# Altium PCB PCB1.PcbDoc
Units mil, origin at the board's own origin, x right, y up, seen from the top; angles counter-clockwise.
Board outline 2376.18 x 2801.18 mil, 2 copper layers (Top Layer, Bottom Layer), stack 61.756 mil thick; 60 components, 29 nets, 134 pads, 254 vias.
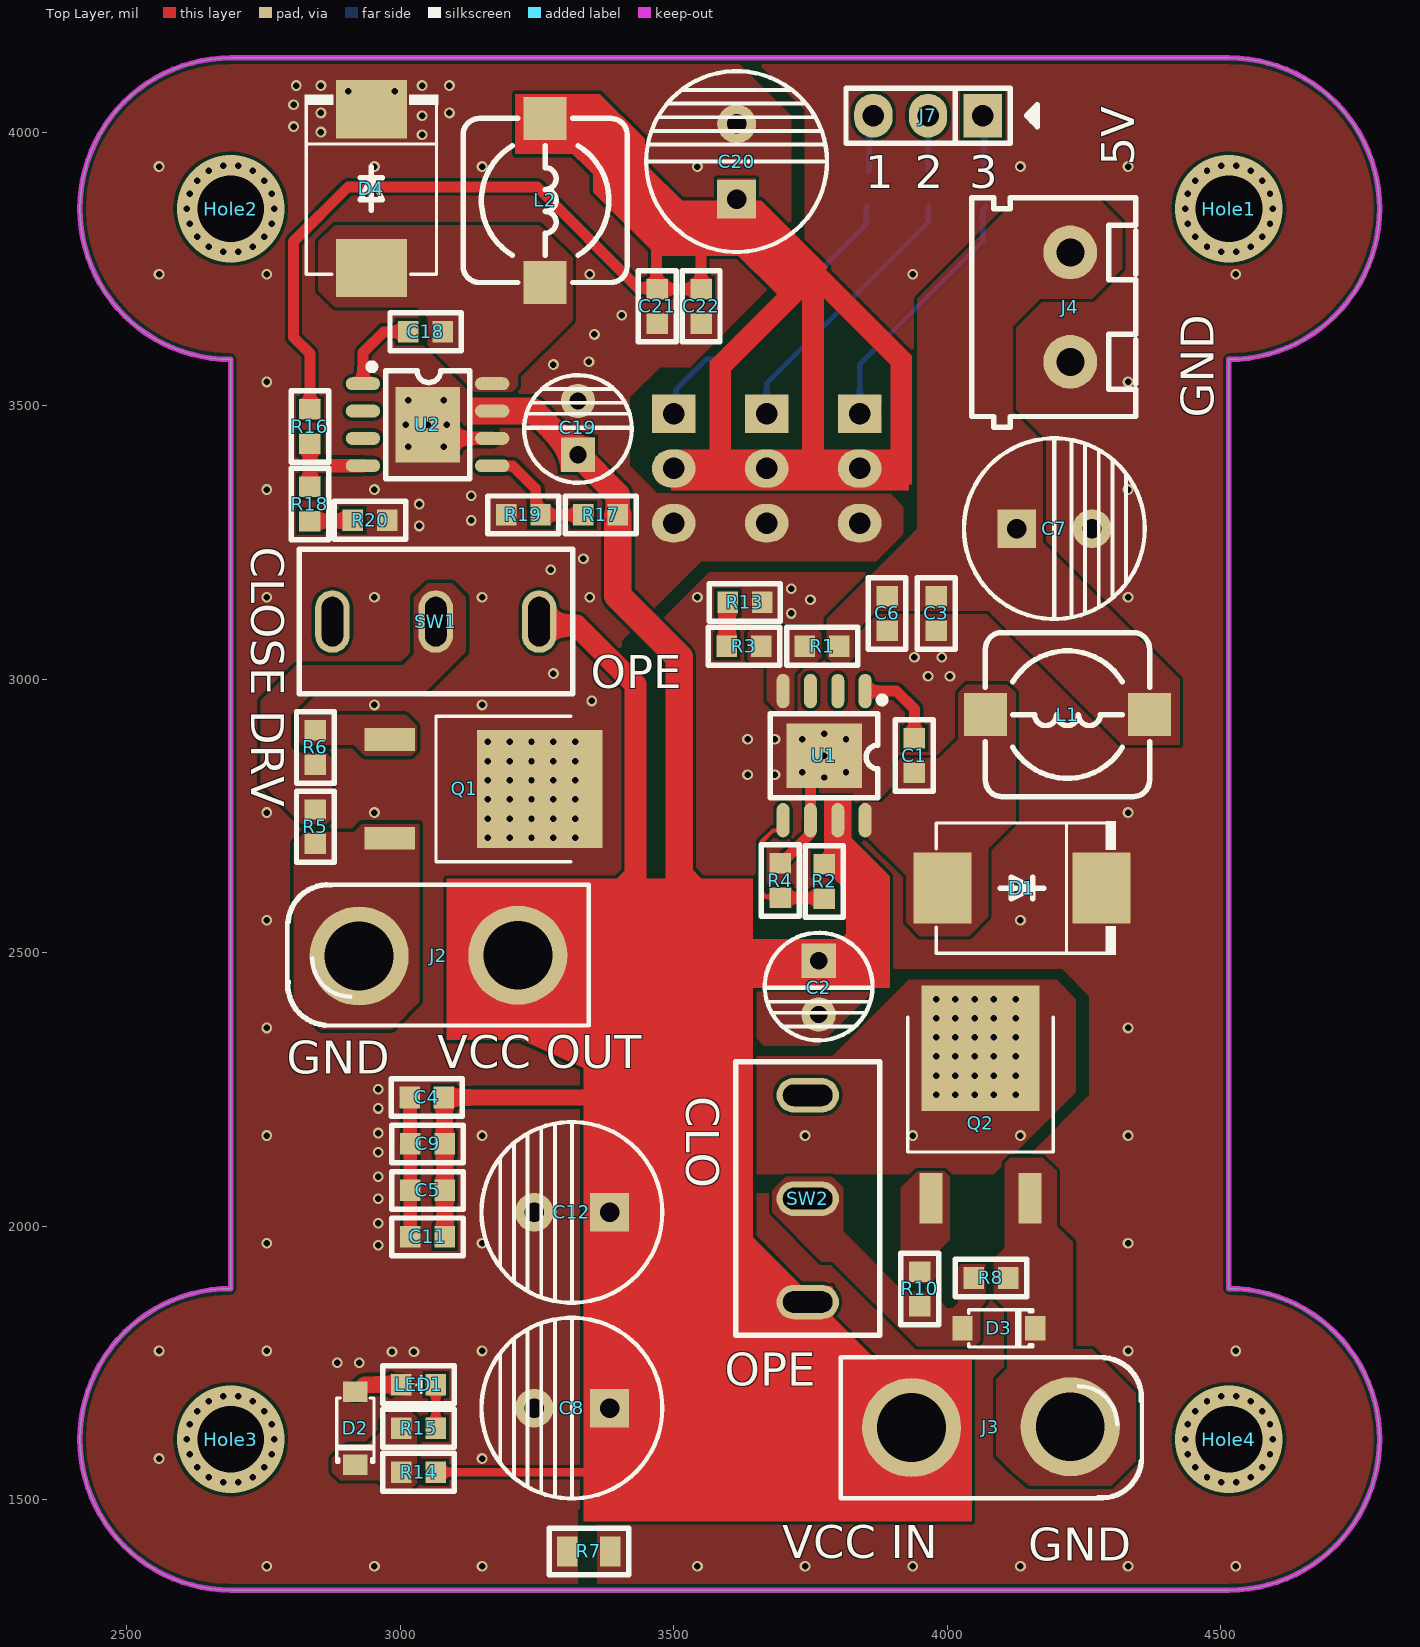
[diagram p0: Top Layer view]
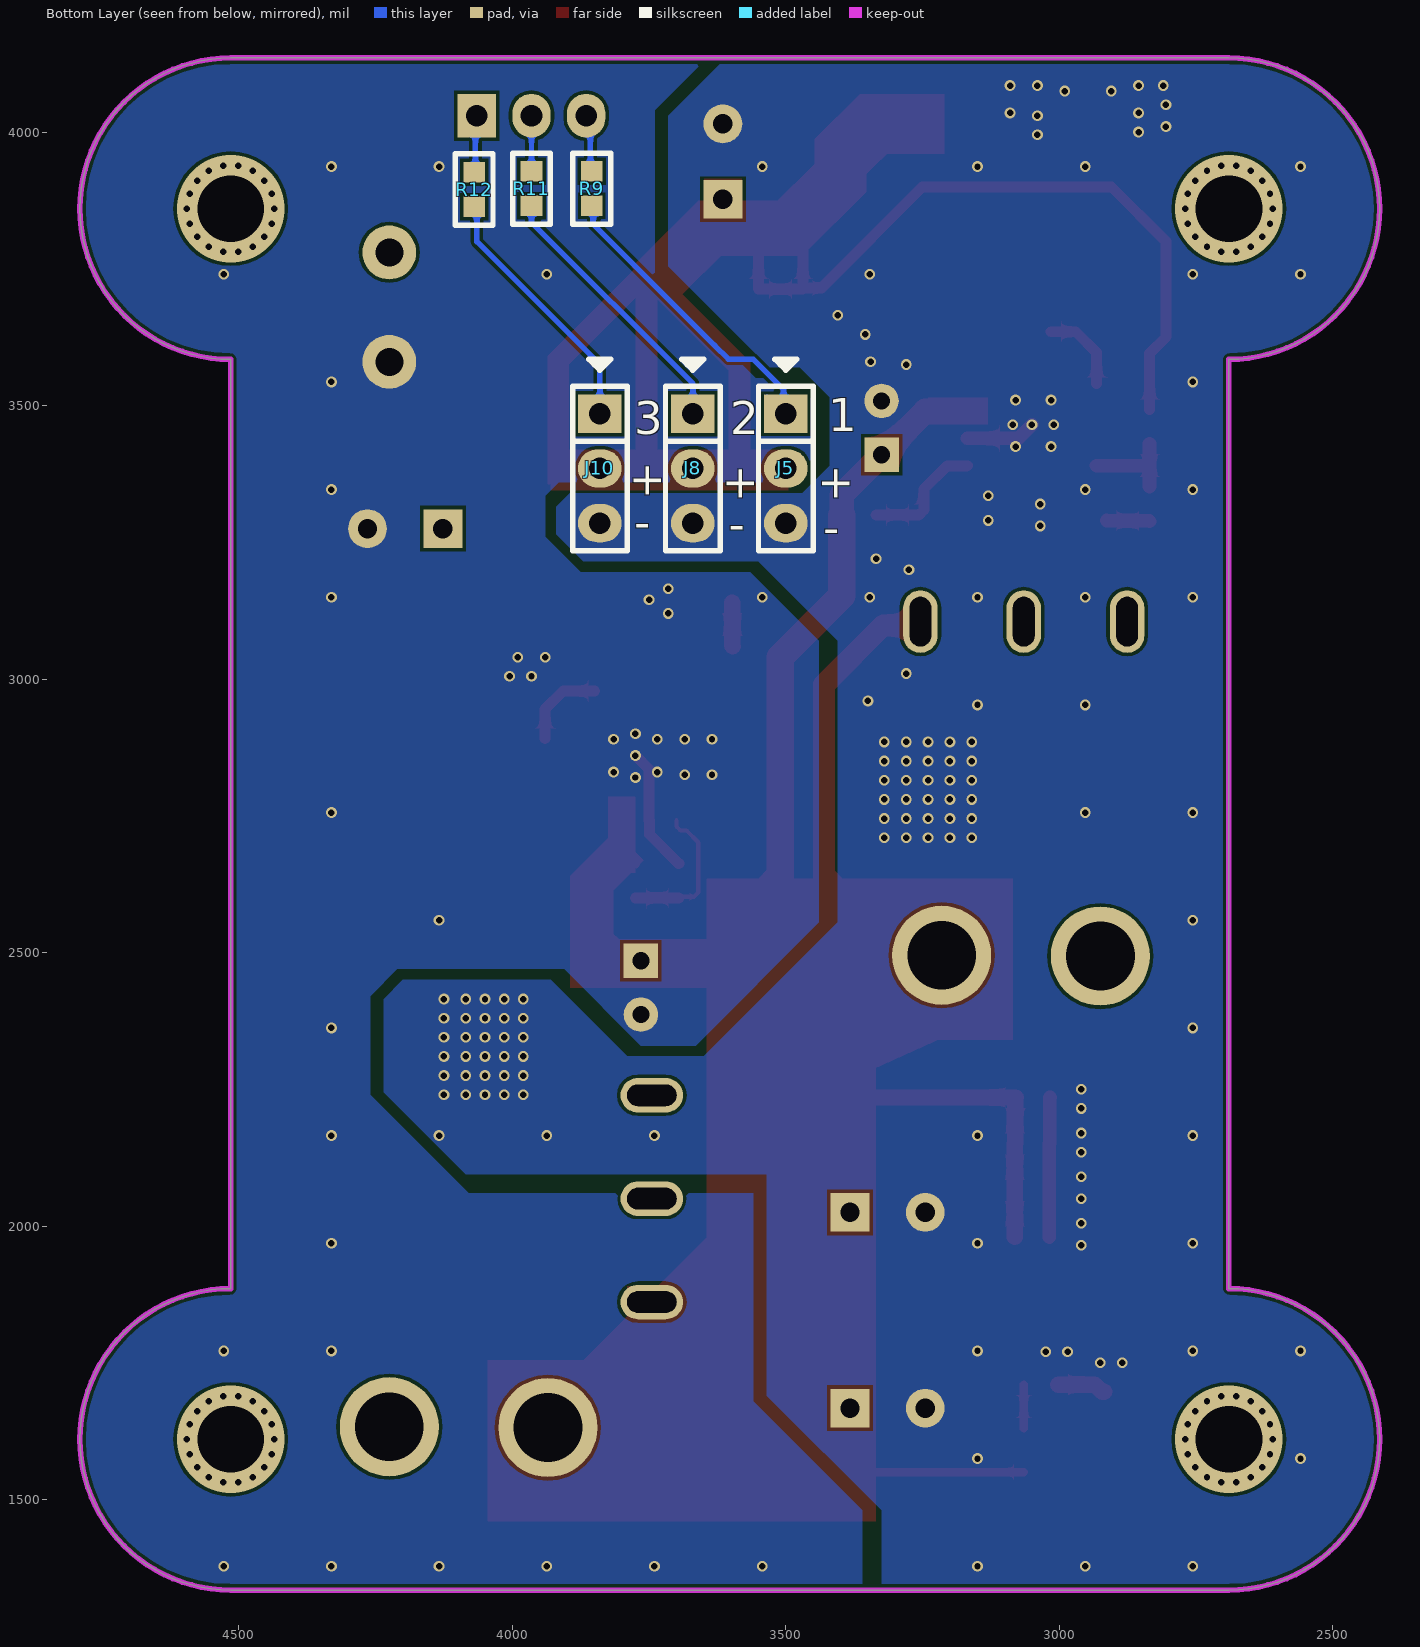
[diagram p1: Bottom Layer view, seen from below]
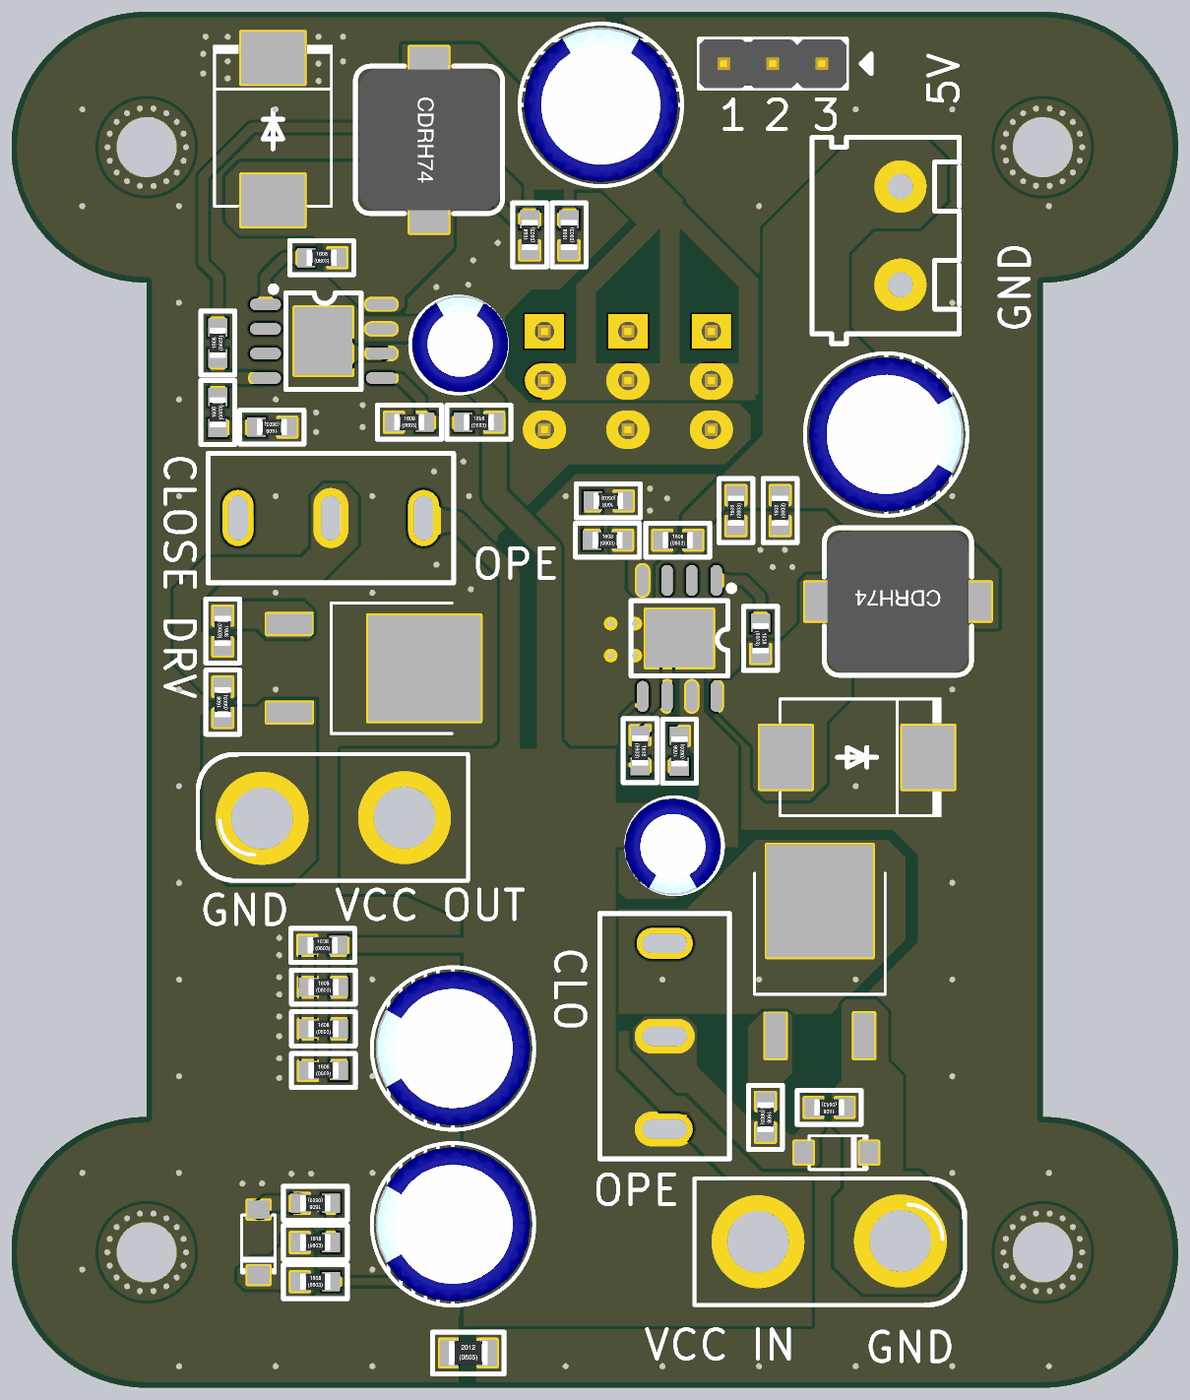
[diagram p2: 3D render of the assembled board from above, using the file's embedded part models]
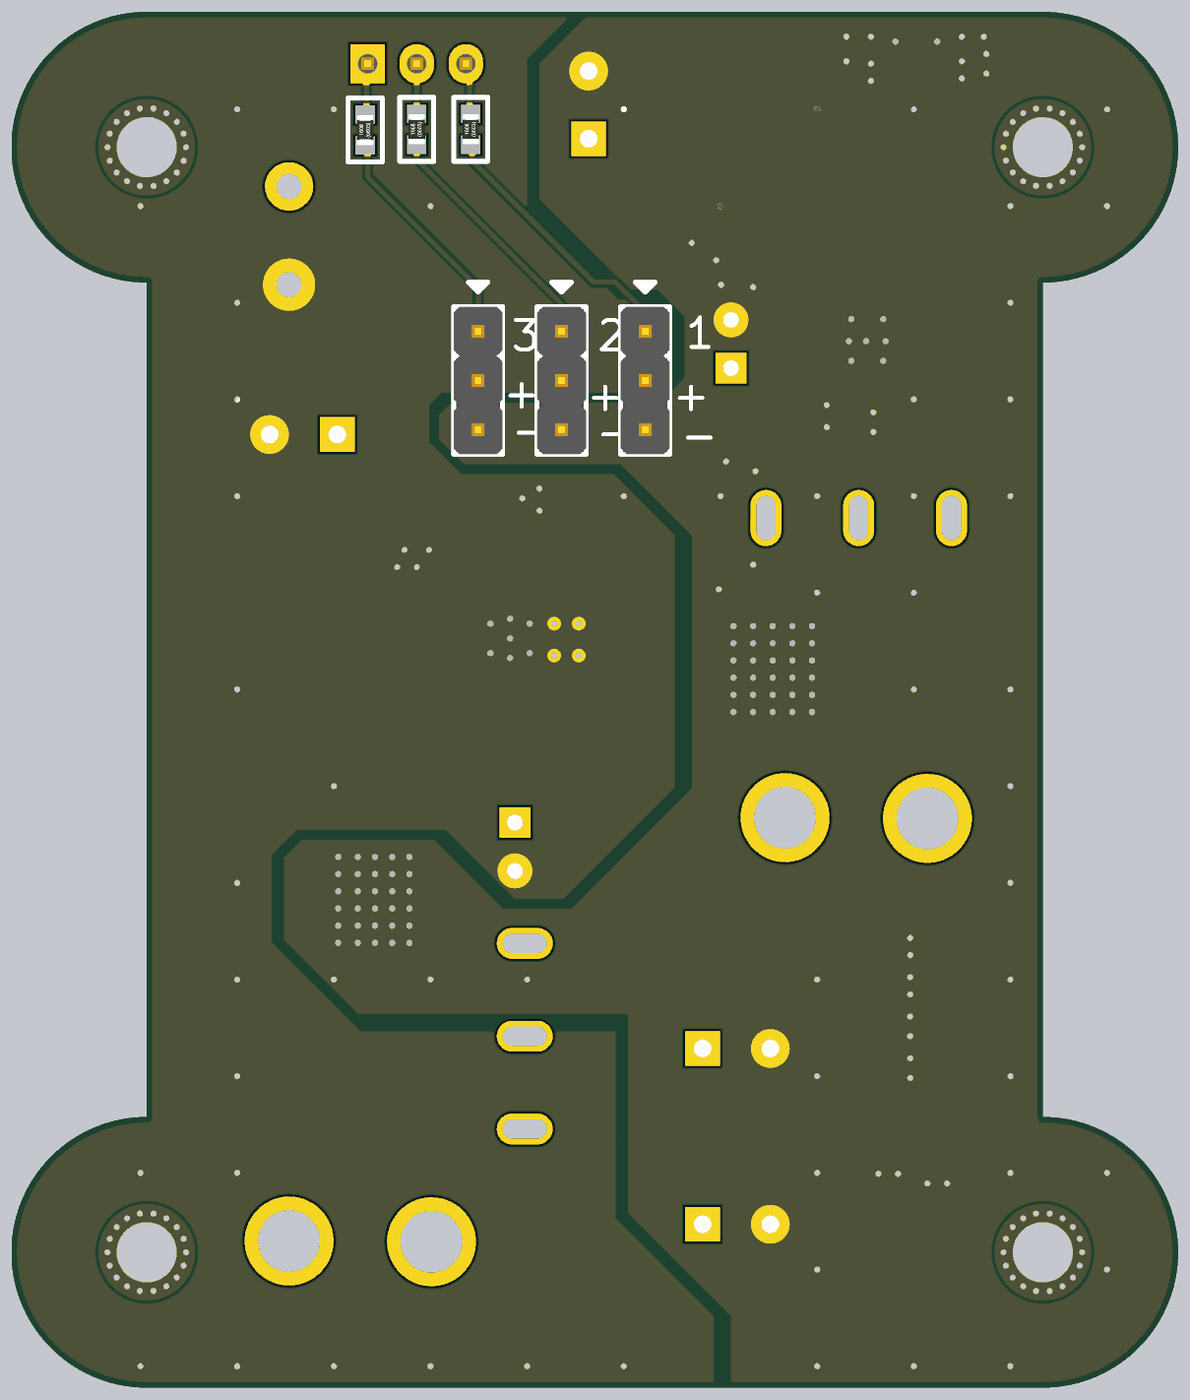
[diagram p3: 3D render of the assembled board from below, using the file's embedded part models]

## Layer stack, top to bottom
Top Solder: solder mask 1, SM-001, Dk 4
Top Layer: signal copper 1.378
Dielectric 1: core 59, Core-043, Dk 4.3
Bottom Layer: signal copper 1.378
Bottom Solder: solder mask 1, SM-001, Dk 4

## Board outline
2414.41,1610 ccw(c2690,1610) 2690,1334.41 4515,1334.41 ccw(c4515,1610) 4790.59,1610 ccw(c4515,1610) 4515,1885.59 4515,3584.41 ccw(c4515,3860) 4790.59,3860 ccw(c4515,3860) 4515,4135.59 2690,4135.59 ccw(c2690,3860) 2414.41,3860 ccw(c2690,3860) 2690,3584.41 2690,1885.59 ccw(c2690,1610)

## Design rules (kind name [scope] priority, off if disabled: settings)
Clearance [All] p1: gap=6 ignorepadtopadclearanceinfootprint=FALSE except(0: Arc-Hole Track-Hole SMDPad-Hole THPad-Hole Via-Hole Fill-Hole Poly-Hole Region-Hole Text-Hole)
PolygonConnect [All] p1: connectstyle=Direct reliefconductorwidth=10 reliefentries=4 polygonreliefangle="90 Angle" airgapwidth=10
RoutingVias [All] p1: holewidth=11.81 width=19.68 viastyle="Through Hole" minholewidth=11.81 minwidth=19.68 maxholewidth=3897.64 maxwidth=39330.71
SolderMaskExpansion [All] p1: expansion=4 istentingtop=FALSE
Width [All] p1: maxlimit=99 minlimit=8 preferedwidth=8
30 further rules are at their usual default settings.

## Components (designator, comment, footprint, x,y, rotation, side; value= is the part's Value field where it differs from the comment)
C1 "10NF" 0603 3940,2860 r270 top
C2 "33UF" DIP-EC2.5X5X11 3765,2485 r270 top
C3 "0.1UF" 0603 3980,3120 r90 top
C4 "0.1UF" 0603 3048.5,2235 r0 top
C5 "10uf" 0603 3050,2065 r0 top
C6 "0.1UF" 0603 3890,3120 r90 top
C7 "220UF" DIP-EC3.5X8X11.5 4127.02,3275 r0 top
C8 "220UF" DIP-EC3.5X8X11.5 3382.8,1667.05 r180 top
C9 "0.1UF" 0603 3050,2150 r0 top
C11 "10uf" 0603 3050,1980 r0 top
C12 "220UF" DIP-EC3.5X8X11.5 3382.8,2025 r180 top
C18 "10NF" 0603 3046.5,3635 r0 top
C19 "33UF" DIP-EC2.5X5X11 3325,3410 r90 top
C20 "220UF" DIP-EC3.5X8X11.5 3615,3877.2 r90 top
C21 "0.1UF" 0603 3470,3681.5 r90 top
C22 "0.1UF" 0603 3550,3681.5 r90 top
D1 "B540C" B540C 4125,2620 r180 top
D2 "BZT52C3V3" sod123 2920,1635 r90 top
D3 "BZT52C16" sod123 4090,1815 r180 top
D4 "B540C" B540C 2945,3885 r270 top
Hole1 "3mmVias" 3mm 4515,3860 r0 top
Hole2 "3mmVias" 3mm 2690,3860 r0 top
Hole3 "3mmVias" 3mm 2690,1610 r0 top
Hole4 "3mmVias" 3mm 4515,1610 r0 top
J2 "TX60" 焊盘 3040,2516.5 r180 top
J3 "TX60" 焊盘 4110,1610 r0 top
J4 "HDR1x2" KF301 4195,3670 r90 top
J5 "HDR1x3" PIN-3-2.54-1.0 3500,3385 r270 bottom
J7 "HDR1x3" PIN-3-2.54-1.0 3965,4030 r180 top
J8 "HDR1x3" PIN-3-2.54-1.0 3670,3385 r270 bottom
J10 "HDR1x3" PIN-3-2.54-1.0 3840,3385 r270 bottom
L1 "10UH" CDRH74 4220,2935 r180 top
L2 "10UH" CDRH74 3265,3875 r270 top
LED1 "LED0" 0603-led 3033.5,1710 r180 top
Q1 "VBE1302" TO-252-2 3140,2795 r180 top
Q2 "VBE1302" TO-252-2 4065,2210 r270 top
R1 "10K" 0603 3771.5,3060 r0 top
R2 "10K" 0603 3775,2630 r90 top
R3 "3K" 0603 3628.5,3060 r0 top
R4 "5K" 0603 3695,2631.5 r270 top
R5 "4.7K" 0603 2845,2730 r90 top
R6 "1K" 0603 2845,2875 r270 top
R7 "0805磁珠" 0805 3345,1405 r0 top
R8 "4.7K" 0603 4080,1905 r180 top
R9 "1K" 0603 3855,3896.5 r90 bottom
R10 "1K" 0603 3950,1885 r270 top
R11 "1K" 0603 3965,3896.5 r90 bottom
R12 "1K" 0603 4070,3895 r90 bottom
R13 "240R" 0603 3630,3140 r180 top
R14 "2.2K" 0603 3033.5,1550 r0 top
R15 "1K" 0603 3033.5,1630 r0 top
R16 "10K" 0603 2835,3461.5 r90 top
R17 "10K" 0603 3366.5,3300 r0 top
R18 "3K" 0603 2835,3320 r90 top
R19 "5K" 0603 3225,3300 r0 top
R20 "240R" 0603 2945,3290 r180 top
SW1 "SWITCH-SPST" ss12d10 3066.53,3107.05 r0 top
SW2 "SWITCH-SPST" ss12d10 3747.05,2048.47 r270 top
U1 "TPS5450" TPS5450 3775,2860 r180 top
U2 "TPS5450" TPS5450 3050,3465 r270 top

## Footprints (in the part's own frame and the unit in brackets; to place one, negate y for a bottom-side part, rotate by r counter-clockwise, add the part's x,y. Pads: shape width x height; smd on the part's side, far side on the other; paste and mask are expansions set on the pad)
3mm [mil]
0603 [mm] "SMD, 0603"
  rect 0.95x1 smd: 1(-0.8,0) 2(0.8,0)
  silkscreen extent -1.66,-0.88 1.66,0.88, body extent -0.78,-0.43 0.77,0.43, height 0.45
0603-led [mm] "SMD, 0603"
  rect 0.95x1 smd: 1(-0.8,0) 2(0.8,0)
  silkscreen extent -1.66,-0.88 1.66,0.88, body extent -0.77,-0.43 0.77,0.43, height 0.45
0805 [mm] "SMD, 0805"
  rect 0.95x1.4 smd: 1(-1,0) 2(1,0)
  silkscreen extent -1.85,-1.08 1.85,1.08, body extent -1,-0.62 1,0.63, height 0.45
B540C [mm]
  rect 2.7x3.3 smd: 1(-3.984,0.054) 2(3.389,0.054)
  silkscreen extent -4.65,-3.05 3.68,3.16
CDRH74 [mm] "7.3*7.3*4.5mm（长宽高）"
  rect 2x2 smd: 1(-3.81,0) 2(3.81,0)
  silkscreen extent -3.81,-3.81 3.81,3.81, body extent -3.65,-3.62 3.65,3.68, height 4.5
DIP-EC2.5X5X11 [mm]
  rect 1.6x1.6 hole 0.8: 1(0,0)
  round 1.6 hole 0.8: 2(2.5,0)
  silkscreen extent -1.3,-2.5 3.7,2.5, body extent -1.25,-2.59 3.75,2.41, height 11.03
DIP-EC3.5X8X11.5 [mm]
  rect 1.8x1.8 hole 0.9: 1(0,0)
  round 1.8 hole 0.9: 2(3.5,0)
  silkscreen extent -2.45,-4.2 5.95,4.2, body extent -2.25,-4 5.75,4, height 11.53
KF301 [mil]
  round 98.42 hole 51.18: 1(-90,-30) 2(110,-30)
  silkscreen extent -210,-150 210,150
PIN-3-2.54-1.0 [mil] "Pin Header"
  rect 70x80 hole 39.37: 1(-100,0)
  oval 70x80 hole 39.37: 2(0,0) 3(100,0)
  silkscreen extent -200,-50 150,50, body extent -150,-50 150,50, height 398
sod123 [mm]
  rect 0.95x1.15 smd: 1(-1.811,0.053) 2(1.574,0.053)
  silkscreen extent -1.7,-0.81 1.29,0.92
ss12d10 [mm]
  oval 1.6x2.9 hole 1 slot 2.3 at 90 deg: 1(-4.839,-0.052) 2(-0.039,-0.052) 3(4.761,-0.052)
  silkscreen extent -6.39,-3.4 6.31,3.3
TO-252-2 [mil]
  rect 91.97x41.89 smd: 1(159.14,-94.24) 3(159.14,86.08)
  rect 229.37x216.19 smd: 4(-115.31,-4.08)
  silkscreen extent -172,-137 75,129
TPS5450 [mm]
  oval 0.6x1.6 smd: 1(-1.905,-3) 2(-0.635,-3) 3(0.635,-3) 4(1.905,-3) 5(1.905,3) 6(0.635,3) 7(-0.635,3) 8(-1.905,3)
  rect 3.5x3 smd: 9(0,0)
  silkscreen extent -2.84,-2.74 2.5,1.95
焊盘 [mm]
  round 4.6 hole 3.2: 1(2.921,0.584) 2(-4.445,0.546)
  silkscreen extent -7.73,-2.73 6.25,3.81, body extent -7.7,-2.73 6.25,3.78, height 0.25

## Part data
C1 C3 C4 C5 C6 C9 C11 C18 C21 C22: library part CAP, "Capacitor"
C2 C7 C8 C12 C19 C20: library part CAP-TANTALUM, "Tantalum Capacitor"
D1 D3 D4: library part SS5x, "Schottky Diode"
D2: library part "Diode 18TQ045", "Schottky Rectifier", ComponentLink1Description="Manufacturer Link", ComponentLink1URL=http://www.irf.com/, ComponentLink2Description=Datasheet, ComponentLink2URL=http://www.irf.com/product-info/datasheets/data/18tq.pdf, DatasheetVersion=Dec-1997, LatestRevisionDate=17-Jul-2002, LatestRevisionNote="Re-released for DXP Platform.", Note="Terminal 2 is the TAB and is electrically connected to the cathode", PackageDescription="TO, Thru-Hole, Vertical, Heatsink Mounted; 3 In-Line Leads (1 Absent); Pitch 2.54 mm", PackageReference=TO-220AC, PackageVersion=Feb-1998, Published=8-Jun-2000, Publisher="Altium Limited"
J2 J3: library part HDR1x2, "Connector"
J4 J5 J7 J8 J10: "Connector"
L1 L2: library part INDUCTANCE, "Inductance"
LED1: "Typical INFRARED GaAs LED", LatestRevisionDate=08-Jul-2005, LatestRevisionNote="Mech Layer 1 removed.", PackageDescription="LED; 2 Leads", PackageReference=LED-0, Published=8-Jun-2000, Publisher="Altium Limited"
Q1 Q2: library part FDB52N20, "N-Channel MOSFET"
R1 R2 R3 R4 R5 R6 R7 R8 R9 R10 R11 R12 R13 R14 R15 R16 R17 R18 R19 R20: library part RES, "Resistor"
SW1 SW2: "Switch"

## Via types
v1: diameter 19.68/19.68 (per signal layer), hole 11.81, Top Layer to Bottom Layer, tented both sides, 246 vias
v2: diameter 19.68, hole 11.81, Top Layer to Bottom Layer, 4 vias
v3: diameter 196.85/196.85 (per signal layer), hole 122.05, Top Layer to Bottom Layer, tented both sides, 4 vias

## Nets (pads, with @x,y where several pads share a name; then routed paths per layer and width w, separated by ;. In a path a pad name is that pad's centre, name@x,y a point inside that pad or via, vN(x,y) a via of type N, cw(c..) or ccw(c..) an arc to the next point about the centre after c; other vN are vias at no path point)
3.3: D2.1 R14.1 R15.1
GND: C2.2 C3.1 C6.1 C7.2 D1.1 J4.1 R4.1 R7.2 R13.1 U1.6 U1.9 | length 230.7
  Top Layer w20: R4.1 3695.98,2662.99 3749.31,2716.31 3749.31,2741.2 U1.6 3750,2835 v1(3775,2860)
  other v1: 3543.31,1377.95 3740.16,1377.95 3937.01,1377.95 4133.86,1377.95 4330.71,1377.95 4527.56,1377.95 4330.71,1771.65 4527.56,1771.65 4330.71,1968.5 4330.71,2165.35 4330.71,2362.2 4133.86,2559.06 4330.71,2755.91 3775,2820 3735,2830 3815,2830 3735,2890 3815,2890 3775,2900 3965,3005 4005,3005 3940,3040 3990,3040 3715,3120 3750,3145 3543.31,3149.61 4330.71,3149.61 3715,3165 4330.71,3346.46 4330.71,3543.31 3937.01,3740.16 4527.56,3740.16 4133.86,3937.01 4330.71,3937.01
  other v2: 3635,2825 3685,2825 3635,2890 3685,2890
NetC1_1: C1.1 U1.1 | length 157.2
  Top Layer w20: U1.1 3906.89,2978.11 3940,2945 C1.1
NetC1_2: C1.2 D1.2 L1.2 U1.8
NetC18_1: C18.1 U2.1 | length 155.8
  Top Layer w20: U2.1 2931.89,3596.89 2970,3635 C18.1
NetC18_2: C18.2 D4.2 L2.2 U2.8
NetD3_1: D3.1 J3.1 Q2.3 R8.1
NetD3_2: D3.2 R8.2 R10.2 SW2.2
NetJ2_1: J2.1 Q1.3 R5.1
NetJ5_1: J5.1 R9.1 | length 600.8
  Bottom Layer w10: J5.1@3535,3515 3505,3485 J5.1 3504.14,3489.14 3504.14,3529.14 3560,3585 3605,3585 3630,3610 3852.16,3832.16 3852.16,3862.16 R9.1
NetJ8_1: J8.1 R11.1 | length 502.2
  Bottom Layer w10: J8.1 3670,3540 3965,3835 R11.1
NetJ10_1: J10.1 R12.1 | length 493.8
  Bottom Layer w10: J10.1 3840,3574.74 4065,3799.74 4065,3858.5 R12.1 ; J10.1@3875,3480 J10.1@3875,3500
NetLED1_1: LED1.1 R15.2 | length 80
  Top Layer w15: R15.2 LED1.1
NetQ1_1: Q1.1 R6.1
NetQ2_1: Q2.1 R10.1
NetR1_1: R1.1 R3.2 U1.4
NetR2_1: R2.1 R4.2 U1.5 | length 274.2
  Top Layer w8: R4.2 3693,2602 3668,2602 3660,2610 3660,2701.57 3681.48,2723.05 3692.78,2723.05 3700,2730.27 U1.5
  Top Layer w20: R4.2 R2.1@3775,2600
NetR3_1: R3.1 R13.2 | length 80.6
  Top Layer w30: R3.1 3597.76,3060.75 3597.76,3139.25 R13.2
NetR5_2: R5.2 R6.2 SW1.2
NetR16_1: R16.1 R18.2 U2.4 | length 175.7
  Top Layer w25: R18.2 2835,3390.75 ; R16.1 2835,3390.75 ; U2.4 2835.75,3390 2835,3390.75
NetR17_1: R17.1 R19.2 U2.5 | length 226.7
  Top Layer w20: U2.5 3168.8,3389.31 3205.69,3389.31 3247.8,3347.2 3247.8,3308.7 R19.2 R17.1
NetR18_1: R18.1 R20.2 | length 79.1
  Top Layer w25: R18.1 2835.75,3289.25 2912.76,3289.25 R20.2
PGND: C4.1 C5.1 C8.2 C9.1 C11.1 C12.2 C19.2 C20.2 C21.1 C22.1 D2.2 D4.1 J5.3 J8.3 J10.3 LED1.2 Q1.4 Q2.4 R7.1 R19.1 R20.1 U2.6 U2.9 | length 473.6
  Top Layer w25: C4.1 3017.76,2234.25 3017.76,2150.75 C9.1 C5.1 C11.1 ; v1(3050,3465) 3075,3440 U2.6
  Top Layer w30: D2.2 2921.84,1696.97 2934.87,1710 LED1.2
  other v1: 2755.91,1377.95 2952.76,1377.95 3149.61,1377.95 2559.06,1574.8 3149.61,1574.8 2885,1750 2925,1750 2985,1770 3025,1770 2559.06,1771.65 2755.91,1771.65 3149.61,1771.65 2960,1965 2755.91,1968.5 3149.61,1968.5 2960,2005 2960,2050 2960,2090 2960,2135 2755.91,2165.35 3149.61,2165.35 3740.16,2165.35 3937.01,2165.35 4133.86,2165.35 2960,2170 2960,2215 3980,2240 4015,2240 4050,2240 4085,2240 4125,2240 2960,2250 3980,2275 4015,2275 4050,2275 4085,2275 4125,2275 3980,2310 4015,2310 4050,2310 4085,2310 4125,2310 3980,2345 4015,2345 4050,2345 4085,2345 4125,2345 2755.91,2362.2 3980,2380 4015,2380 4050,2380 4085,2380 4125,2380 3980,2415 4015,2415 4050,2415 4085,2415 4125,2415 2755.91,2559.06 3160,2710 3200,2710 3240,2710 3280,2710 3320,2710 3160,2745 3200,2745 3240,2745 3280,2745 3320,2745 2755.91,2755.91 2952.76,2755.91 3160,2780 3200,2780 3240,2780 3280,2780 3320,2780 3160,2815 3200,2815 3240,2815 3280,2815 3320,2815 3160,2850 3200,2850 3240,2850 3280,2850 3320,2850 3160,2885 3200,2885 3240,2885 3280,2885 3320,2885 2952.76,2952.76 3149.61,2952.76 3350,2960 3280,3010 2755.91,3149.61 2952.76,3149.61 3149.61,3149.61 3346.46,3149.61 3275,3200 3335,3220 3035,3280 3130,3290 3035,3320 3130,3335 2755.91,3346.46 2952.76,3346.46 3015,3425 3080,3425 3010,3465 3085,3465 3015,3510 3080,3510 2755.91,3543.31 3280,3575 3345,3580 3355,3630 3405,3665 2559.06,3740.16 2755.91,3740.16 3346.46,3740.16 2559.06,3937.01 2952.76,3937.01 3149.61,3937.01 3543.31,3937.01 3040,3995 2855,4000 2805,4010 3040,4030 2855,4035 3090,4035 2805,4050 2905,4075 2990,4075 2810,4085 2855,4085 3040,4085 3090,4085
SERVE_CTR_1: J7.3 R9.2 | length 106.1
  Bottom Layer w10: R9.2 3857.35,3930.34 3857.35,4022.35 J7.3
SERVE_CTR_2: J7.2 R11.2 | length 102
  Bottom Layer w10: R11.2 J7.2
SERVE_CTR_3: J7.1 R12.2 | length 105.6
  Bottom Layer w10: J7.1 4067.5,4027.5 4067.5,3929 R12.2
VCC5V: C3.2 C6.2 C7.1 J4.2 L1.1 R1.2
VCC_serve: C20.1 C21.2 C22.2 J5.2 J8.2 J10.2 L2.1 R16.2 | length 1381.6
  Top Layer w20: R16.2 2835,3595 2805,3625 2805,3800 2905,3900 3250,3900 3435,3715 3467.99,3715 C21.2@3468.75,3714.24 ; 3470,3810 3468.75,3808.75 C21.2@3468.75,3714.24 ; 3550,3795 C22.2 C21.2 C21.2@3468.75,3714.24
  Top Layer w60: 3445,3865 3465,3865
VCCBAT: C2.1 C4.2 C5.2 C8.1 C9.2 C11.2 C12.1 C19.1 J2.2 J3.2 R2.2 R14.2 R17.2 SW1.3 SW2.3 U1.7 U2.7 | length 3014.7
  Top Layer w15: R14.2 3345,1550 3350,1545 ; C2.1@3754.79,2495.21 C2.1 ; R2.2@3774.02,2661.5 R2.2
  Top Layer w25: U1.7@3800,2723.58 U1.7
  Top Layer w30: C11.2 C5.2 C9.2 3080.75,2150.75 3080.75,2234.25 C4.2 3350,2235 ; 3365,2487.5 3461.25,2583.75 3473.75,2583.75 3510,2620 ; 3650,1860 3743.98,1860 SW2.3
  Top Layer w40: SW1.3 3260.96,3098.02 3321.98,3098.02 3430,2990 3430,2615 3461.25,2583.75 ; 3595,2490 3600,2485 C2.1
  Top Layer w45: U2.7@3177.11,3490 3245,3490 3317.5,3417.5 3317.5,3412.5 3320,3410 C19.1@3332.5,3410 ; C19.1 3397.99,3337.01 R17.2
  Top Layer w50: R17.2 3397.99,3152.01 3510,3040 3510,2620
pads on no net: SW1.1 SW2.1 U1.2 U1.3 U2.2 U2.3
copper on no net:
  other v1: 2676.11,1531.22 2703.89,1531.22 4501.11,1531.22 4528.89,1531.22 2650,1540.72 2730,1540.72 4475,1540.72 4555,1540.72 2628.72,1558.58 2751.28,1558.58 4453.72,1558.58 4576.28,1558.58 2614.82,1582.64 2765.18,1582.64 4439.82,1582.64 4590.18,1582.64 2610,1610 2770,1610 4435,1610 4595,1610 2614.82,1637.36 2765.18,1637.36 4439.82,1637.36 4590.18,1637.36 2628.72,1661.42 2751.28,1661.42 4453.72,1661.42 4576.28,1661.42 2650,1679.28 2730,1679.28 4475,1679.28 4555,1679.28 2676.11,1688.78 2703.89,1688.78 4501.11,1688.78 4528.89,1688.78 2676.11,3781.22 2703.89,3781.22 4501.11,3781.22 4528.89,3781.22 2650,3790.72 2730,3790.72 4475,3790.72 4555,3790.72 2628.72,3808.58 2751.28,3808.58 4453.72,3808.58 4576.28,3808.58 2614.82,3832.64 2765.18,3832.64 4439.82,3832.64 4590.18,3832.64 2610,3860 2770,3860 4435,3860 4595,3860 2614.82,3887.36 2765.18,3887.36 4439.82,3887.36 4590.18,3887.36 2628.72,3911.42 2751.28,3911.42 4453.72,3911.42 4576.28,3911.42 2650,3929.28 2730,3929.28 4475,3929.28 4555,3929.28 2676.11,3938.78 2703.89,3938.78 4501.11,3938.78 4528.89,3938.78
  other v3: 2690,1610 4515,1610 2690,3860 4515,3860

## Polygon pours and split planes (outlines as drawn)
GND on Top Layer "GND_L01_P051" (solid, remove dead copper, pour order 51): 3630,4150 3740,4040 3740,3735 3555,3550 3485,3550 3445,3510 3445,3405 3490,3360 3915,3360 3940,3335 3940,3260 3875,3195 3565,3195 3440,3070 3440,2555 3665,2330 3765,2330 3905,2470 4210,2470 4260,2420 4260,2240 4080,2060 3560,2060 3560,1680 3360,1480 3360,1300 4840,1300 4905,1235 5020,1350 5020,4275
PGND on Top Layer "PGND_L01_P048" (solid, remove dead copper, pour order 48): 2140,4310 3435,4310 3715,4030 3715,3755 3530,3570 3475,3570 3420,3515 3420,3390 3470,3340 3895,3340 3920,3315 3920,3265 3870,3215 3550,3215 3405,3070 3405,2555 3650,2310 3790,2310 3930,2450 4200,2450 4235,2415 4235,2245 4085,2095 3535,2095 3535,1690 3325,1480 3325,1305 2175,1305 2160,1290
NetC18_2 on Top Layer "NETC18_2_L01_P028" (solid, remove dead copper, pour order 28): 2850,3800 2880,3830 3255,3830 3315,3770 3315,3655 3215,3555 3215,3535 3205,3525 3135,3525 3050,3610 3050,3660 3030,3680 2880,3680 2850,3710
3.3 on Top Layer "3.3_L01_P013" (solid, remove dead copper, pour order 13): 2875,1575 2895,1595 2905,1600 2940,1600 2965,1625 2965,1645 2980,1660 3020,1660 3030,1650 3030,1530 3020,1520 2975,1520 2960,1535 2890,1535 2875,1550
VCC5V on Top Layer "VCC5V_L01_P012" (solid, remove dead copper, pour order 12): 4425,2880 4425,3000 4175,3250 4175,3435 4120,3490 4120,3645 4170,3695 4265,3695 4320,3750 4320,3835 4280,3875 4125,3875 3945,3695 3945,3275 3780,3110 3780,3040 3790,3030 3820,3030 3830,3040 3830,3085 3870,3125 4075,3125 4320,2880
NetR1_1 on Top Layer "NETR1_1_L01_P011" (solid, remove dead copper, pour order 11): 3690,2940 3670,2960 3670,3025 3645,3025 3635,3035 3635,3085 3645,3095 3760,3095 3770,3085 3770,3040 3760,3030 3740,3030 3720,3010 3720,2945 3715,2940
NetC1_2 on Top Layer "NETC1_2_L01_P010" (solid, remove dead copper, pour order 10): 3950,2530 3925,2555 3925,2640 3845,2720 3845,2775 3880,2775 3905,2800 3905,2845 3915,2855 3985,2855 4020,2890 4020,2975 4035,2990 4110,2990 4125,2975 4125,2740 4075,2690 4075,2565 4040,2530
NetR5_2 on Top Layer "NETR5_2_L01_P008" (solid, remove dead copper, pour order 8): 3050,3175 3025,3150 3025,3045 3005,3025 2810,3025 2745,2960 2745,2810 2820,2735 2865,2735 2875,2745 2875,2855 2865,2865 2810,2865 2800,2875 2800,2935 2840,2975 3045,2975 3120,3050 3120,3150 3095,3175
NetQ1_1 on Top Layer "NETQ1_1_L01_P007" (solid, remove dead copper, pour order 7): 2935,2860 2915,2880 2820,2880 2815,2885 2815,2930 2820,2935 3010,2935 3030,2915 3030,2870 3020,2860
NetJ2_1 on Top Layer "NETJ2_1_L01_P006" (solid, remove dead copper, pour order 6): 2855,2360 2805,2410 2805,2700 2825,2720 2915,2720 2930,2735 3035,2735 3035,2410 2985,2360
NetQ2_1 on Top Layer "NETQ2_1_L01_P004" (solid, remove dead copper, pour order 4): 3930,1895 3915,1910 3915,2070 3945,2100 3995,2100 4005,2090 4005,1975 3985,1955 3985,1910 3970,1895
NetD3_2 on Top Layer "NETD3_2_L01_P003" (solid, remove dead copper, pour order 3): 4025,1930 4020,1925 4020,1860 4010,1850 4000,1850 3970,1880 3920,1880 3810,1990 3810,2070 3790,2090 3705,2090 3680,2065 3680,2025 3770,1935 3790,1935 3945,1780 4050,1780 4060,1790 4060,1850 4070,1860 4070,1930
NetD3_1 on Top Layer "NETD3_1_L01_P000" (solid, remove dead copper, pour order 0): 4120,1550 4090,1580 4090,1720 4110,1740 4110,1845 4085,1870 4085,1940 4105,1960 4105,2115 4115,2125 4175,2125 4200,2100 4200,2000 4230,1970 4230,1775 4265,1775 4345,1695 4345,1570 4300,1525 4150,1525
GND on Bottom Layer "GND_L02_P052" (solid, remove dead copper, pour order 52): 3630,4150 3740,4040 3740,3735 3555,3550 3485,3550 3445,3510 3445,3405 3490,3360 3915,3360 3940,3335 3940,3260 3875,3195 3565,3195 3440,3070 3440,2555 3665,2330 3765,2330 3905,2470 4210,2470 4260,2420 4260,2240 4080,2060 3560,2060 3560,1680 3360,1480 3360,1300 4840,1300 4905,1235 5020,1350 5020,4275
PGND on Bottom Layer "PGND_L02_P049" (solid, remove dead copper, pour order 49): 2140,4310 3435,4310 3715,4030 3715,3755 3530,3570 3475,3570 3420,3515 3420,3390 3470,3340 3895,3340 3920,3315 3920,3265 3870,3215 3550,3215 3405,3070 3405,2555 3650,2310 3790,2310 3930,2450 4200,2450 4235,2415 4235,2245 4085,2095 3535,2095 3535,1690 3325,1480 3325,1305 2175,1305 2160,1290

## Keep-outs
Keep-Out Layer:
  the board outline again, w10

## Other copper
Top Layer:
  region net VCCBAT: 3520.55,2645.03 3541.76,2623.82 3552.37,2634.43 3531.15,2655.64
  region net VCC_serve: 3936.09,3591.09 3896.09,3591.09 3896.09,3356.09 3936.09,3356.09
  region net VCC_serve: 3759.67,3767.51 3731.39,3739.22 3907.81,3562.81 3936.09,3591.09
  region net VCC_serve: 3759.45,3717.89 3731.17,3746.17 3565,3580 3593.28,3551.72
  rectangle net VCC_serve: 3735,3345 3775,3755
  rectangle net VCC_serve: 3565,3345 3605,3580
  rectangle net VCC_serve: 3495,3345 3930,3420
  region net VCC_serve: 3588.41,3803.41 3710.91,3680.91 3782.5,3752.5 3660,3875
  rectangle net VCC_serve: 3580,3840 3650,3915
  region net VCC_serve: 3660,3875 3468.75,3875 3468.75,3773.75 3660,3773.75
  region net VCC_serve: 3542.5,3847.5 3426.25,3963.75 3352.5,3890 3468.75,3773.75
  region net VCC_serve: 3352.5,3987.5 3352.5,3890 3447.5,3890 3447.5,3987.5
  region net VCC_serve: 3447.5,3987.5 3365,4070 3285,3990 3367.5,3907.5
  rectangle net VCC_serve: 3210,3960 3365,4070
  rectangle net VCCBAT: 3130,3465 3240,3515
  region net VCCBAT: 3415.03,2654.45 3393.82,2633.24 3404.43,2622.63 3425.64,2643.85
  region net VCCBAT: 3815.86,2486.36 3854.75,2525.25 3830,2550 3791.11,2511.11
  rectangle net VCCBAT: 3640,2435 3895,2525
  rectangle net VCCBAT: 3815,2510 3895,2640
  region net VCCBAT: 3841.54,2586.54 3895,2640 3812.5,2722.5 3759.04,2669.04
  rectangle net VCCBAT: 3775,2645 3825,2710
  rectangle net VCCBAT: 3775,2700 3825,2785
  region net VCCBAT: 3407.95,2398.73 3257.26,2465.94 3204.31,2347.21 3355,2280
  rectangle net VCCBAT: 3085,2340 3645,2635
  rectangle net VCCBAT: 3685,1835 3790,1890
  region net VCCBAT: 3886.17,1738.83 3617.5,2007.5 3510,1900 3778.67,1631.33
  region net VCCBAT: 3765,1730 3625,1870 3550.75,1795.75 3690.75,1655.75
  rectangle net VCCBAT: 3335,1460 3645,2520
  rectangle net VCCBAT: 3445,1460 4045,1755

## Silkscreen, mask and mechanical layers (free items; w line width, h text height)
Top Overlay:
  text "5V" at 4342,3938 h60 r90
  text "1" at 3850.5,3897 h60
  text "2" at 3940.5,3897 h60
  text "3" at 4040.5,3897 h60
  text "GND" at 4487,3478 h60 r90
  text "CLOSE DRV" at 2728,3242 h60 r270
  text "OPE" at 3348,2983 h60
  text "VCC OUT" at 3068,2288 h60
  text "GND" at 2793,2278 h60
  text "CLO" at 3523,2237 h60 r270
  text "OPE" at 3593,1708 h60
  text "VCC IN" at 3698,1393 h60
  text "GND" at 4148,1388 h60
Bottom Overlay:
  text "1" at 3422,3453 h60
  text "2" at 3602,3448 h60
  text "3" at 3777,3448 h60
  text "+" at 3728,3397 h60 r270
  text "+" at 3383,3392 h60 r270
  text "+" at 3558,3392 h60 r270
  text "-" at 3777,3301.99 h60 r180
  text "-" at 3604.72,3298.68 h60 r180
  text "-" at 3432,3291.99 h60 r180

## Text inside footprints (layer, text, board x,y; h text height)
J2: Mechanical 15 "+" at 3231.87,2362.7 h80 r180; Mechanical 15 "-" at 2936.98,2361.32 h98.43 r180
J3: Mechanical 15 "-" at 4213.02,1765.18 h98.43; Mechanical 15 "+" at 3918.13,1763.8 h80